# EAGLE board PLT-01-RevB (EAGLE 9.6.2)
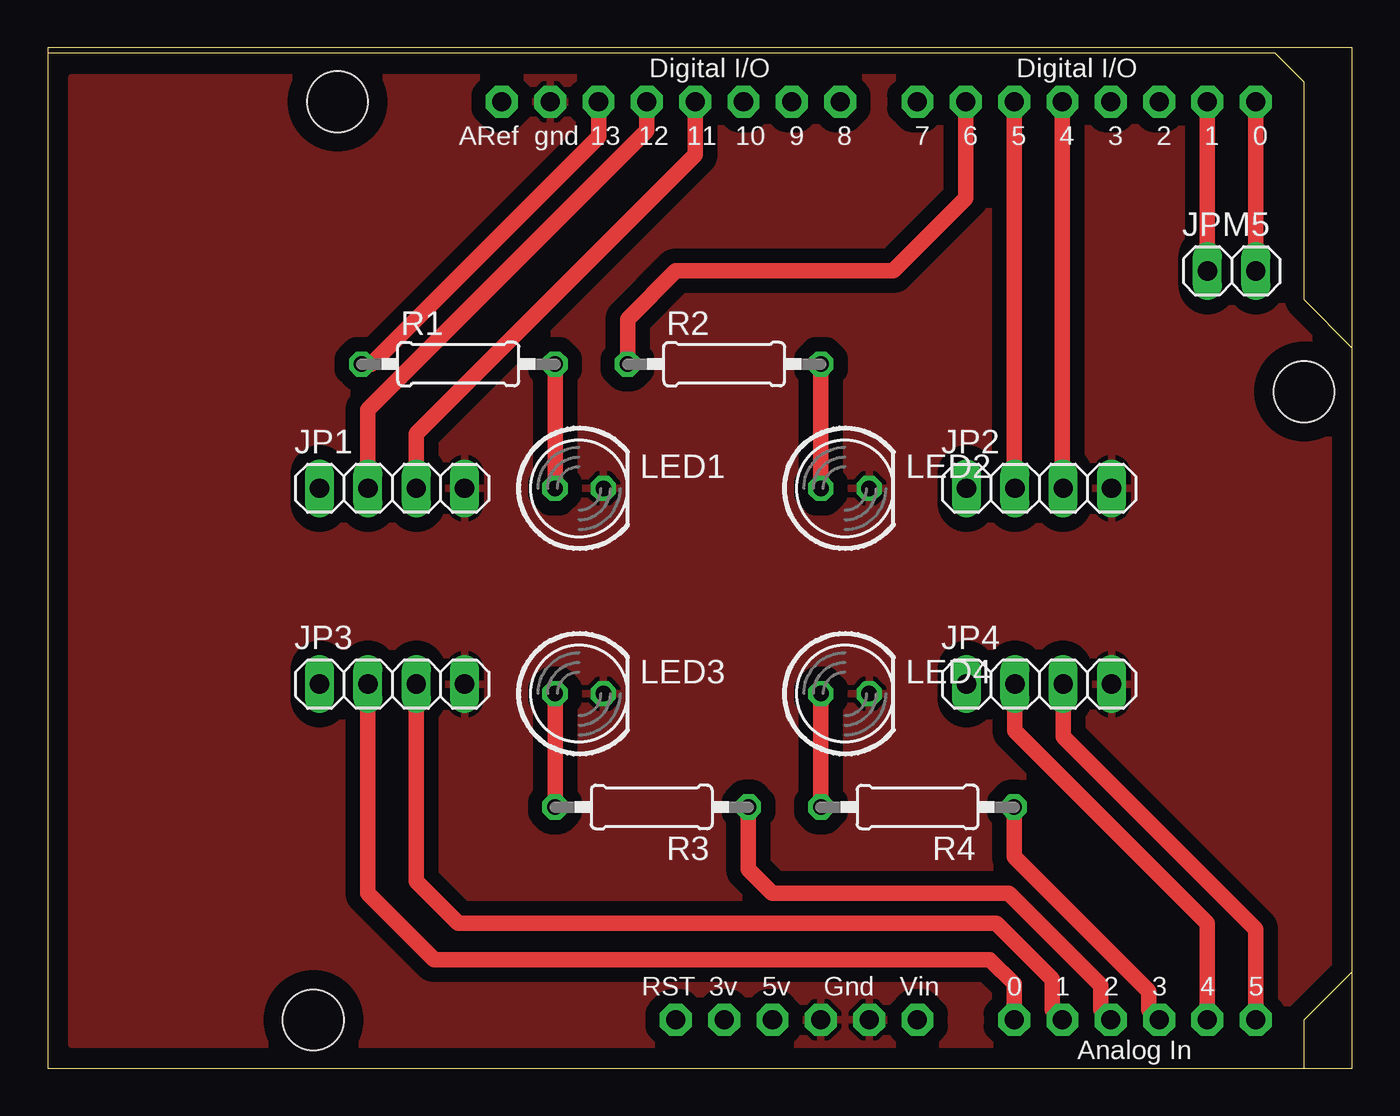
[diagram p0: board, top side]
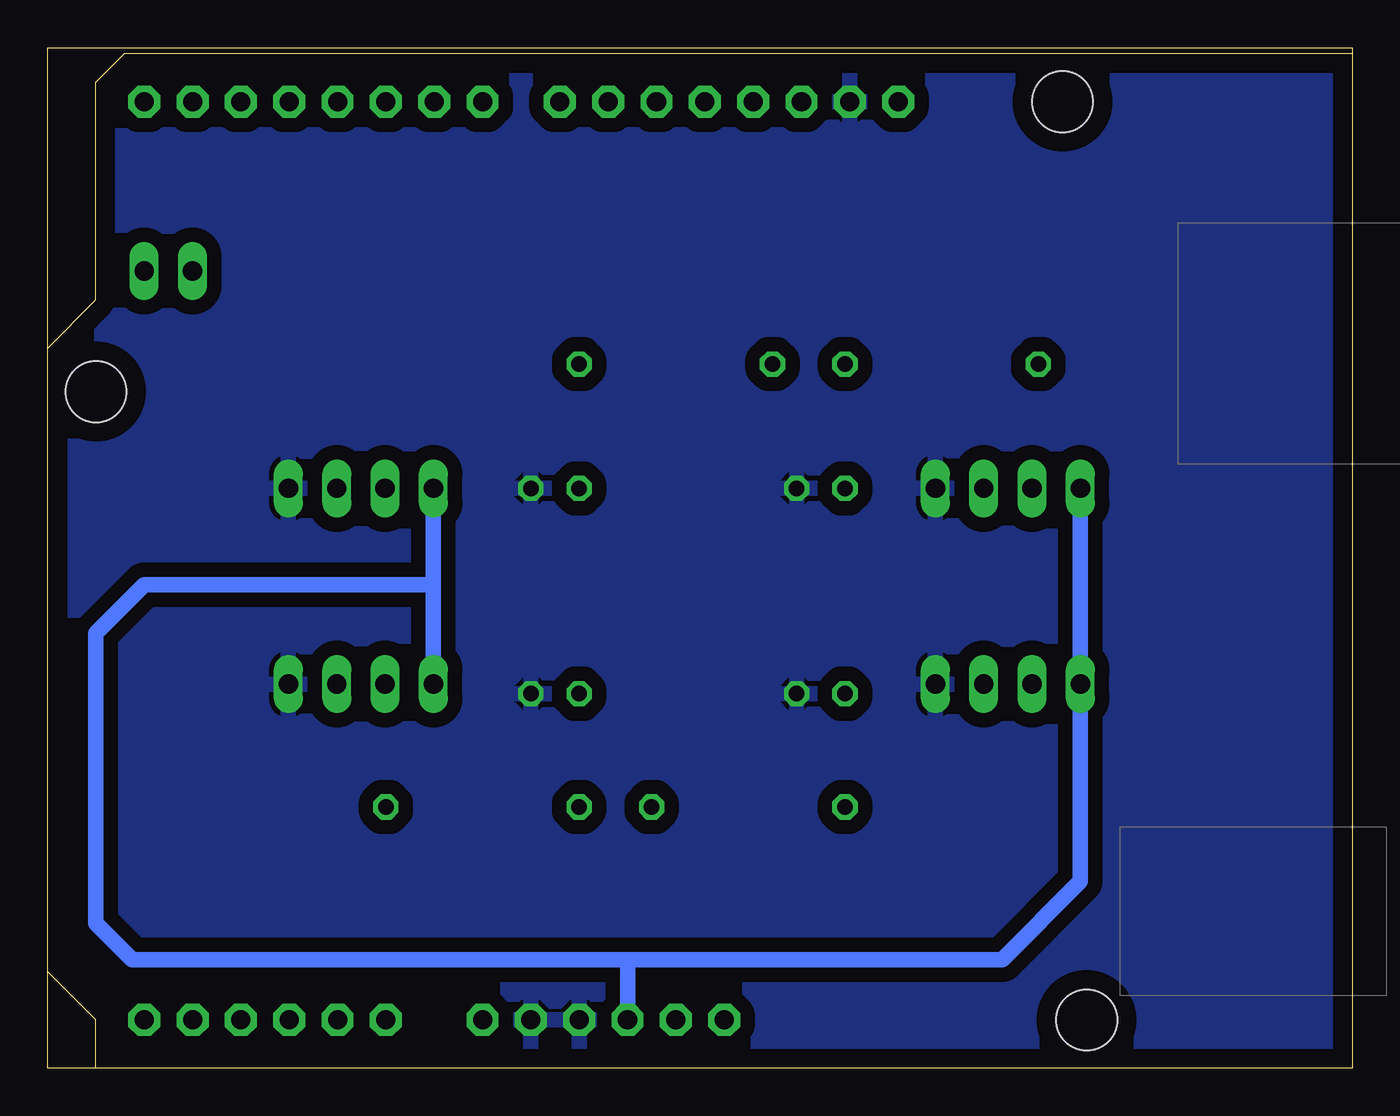
[diagram p1: board, bottom side, seen from below]

Size 68.58 x 53.64 mm. Coordinates in mm from the lower left corner, seen from the top.
Outline: 0,0 68.56,0 68.56,53.64 0,53.64 0,0
Copper layers (1*16): Top 0.035mm / dielectric 1.5mm / Bottom 0.035mm
Design rules "default *": minimum track width 10mil, minimum drill 24mil, track to track 30mil, track to pad 30mil, pad to pad 30mil, via to via 30mil, smd to smd 30mil, copper to edge 40mil, drill to drill 8mil, minimum pad ring 10mil, minimum via ring 8mil, stop-mask expansion 4mil, vias tented up to drill 0mil, thermal gap 10mil

## Footprints (pad centres in the part's own frame; a part is rotated, then mirrored left to right if it is on the bottom)
1X04 = drill 1.016 long: 1 -3.81,0; 2 -1.27,0; 3 1.27,0; 4 3.81,0
1X02 = drill 1.016 long: 1 -1.27,0; 2 1.27,0
LED5MM = drill 0.813 octagon: A -1.27,0; K 1.27,0
0207/10 = drill 0.813 octagon: 1 -5.08,0; 2 5.08,0
ARDUINO = drill 1 pad 1.676 octagon: 3V 35.56,2.54; 5V 38.1,2.54; A0 50.8,2.54; A1 53.34,2.54; A2 55.88,2.54; A3 58.42,2.54; A4 60.96,2.54; A5 63.5,2.54; AREF 23.876,50.8; D0 63.5,50.8; D1 60.96,50.8; D2 58.42,50.8; D3 55.88,50.8; D4 53.34,50.8; D5 50.8,50.8; D6 48.26,50.8; D7 45.72,50.8; D8 41.656,50.8; D9 39.116,50.8; D10 36.576,50.8; D11 34.036,50.8; D12 31.496,50.8; D13 28.956,50.8; GND 26.416,50.8; GND1 43.18,2.54; GND2 40.64,2.54; RESET 33.02,2.54; VIN 45.72,2.54 | hole 3.2: 15.24,50.8; 66.04,35.56; 13.97,2.54

## Placement (x,y rotation side)
JP1  [1X04]  18.11,30.48 0 top
JP2  [1X04]  52.11,30.48 0 top
JP3  [1X04]  18.11,20.19 0 top
JP4  [1X04]  52.11,20.19 0 top
JPM5  [1X02]  62.23,41.91 0 top
LED1  [LED5MM]  27.94,30.48 0 top
LED2  [LED5MM]  41.91,30.48 0 top
LED3  [LED5MM]  27.94,19.69 0 top
LED4  [LED5MM]  41.91,19.69 0 top
R1  [0207/10]  21.59,37.01 0 top
R2  [0207/10]  35.56,37.01 0 top
R3  [0207/10]  31.75,13.73 180 top
R4  [0207/10]  45.72,13.73 180 top
U$1  ARDUINOUNO  [ARDUINO]  0,0 0 top

## Library data of the parts
JP1-JP4 JPM5 = pinhead
LED1-LED4 = led
R1-R4 = resistor
U$1 = adafruit

## Nets
3V: U$1.3V
5V: JP1.1 JP2.1 JP3.1 JP4.1 U$1.5V
GND: JP1.4 JP2.4 JP3.4 JP4.4 LED1.K LED2.K LED3.K LED4.K U$1.GND U$1.GND1 U$1.GND2
N$1: R4.1 U$1.A3
N$3: JP4.3 U$1.A5
N$4: JP2.3 U$1.D4
N$5: JP2.2 U$1.D5
N$6: JP4.2 U$1.A4
N$7: R3.1 U$1.A2
N$8: JP1.3 U$1.D11
N$9: JP1.2 U$1.D12
N$10: R1.1 U$1.D13
N$11: LED2.A R2.2
N$12: LED1.A R1.2
N$13: R2.1 U$1.D6
N$14: LED4.A R4.2
N$15: JP3.2 U$1.A0
N$16: LED3.A R3.2
N$17: JP3.3 U$1.A1
RX: JPM5.2 U$1.D0
TX: JPM5.1 U$1.D1
VIN: U$1.VIN

## Tracks (layer width: path | path; a pad name or v marks a point on that pad's centre or on a via)
5V
  Bottom 0.813: U$1.5V 38.1,5.71 | 38.1,5.71 18.41,5.71 14.3,9.83 JP3.1 JP1.1 | JP4.1 48.3,25.4 | 48.3,25.4 JP2.1 | 38.1,5.71 64.14,5.71 66.04,7.62 66.04,22.86 63.5,25.4 48.3,25.4
GND
  pour Top: 1.27,52.07 1.27,1.27 67.31,1.27 67.31,52.07
  pour Bottom: 1.27,52.07 1.27,5.08 1.27,1.27 67.31,1.27 67.31,52.07
N$1
  Top 0.813: U$1.A3 57.89,3.07 57.89,4.04 50.8,11.13 50.8,11.43 R4.1
N$3
  Top 0.813: JP4.3 53.38,17.43 63.5,7.31 U$1.A5
N$4
  Top 0.813: U$1.D4 53.34,30.52 JP2.3
N$5
  Top 0.813: U$1.D5 50.8,30.52 JP2.2
N$6
  Top 0.813: JP4.2 50.84,17.74 60.96,7.62 U$1.A4
N$7
  Top 0.813: U$1.A2 55.35,3.07 55.35,4.35 50.5,9.2 38.1,9.2 36.83,10.46 R3.1
N$8
  Top 0.813: JP1.3 19.38,33.35 34.04,48.01 U$1.D11
N$9
  Top 0.813: U$1.D12 31.5,49.28 16.84,34.62 JP1.2
N$10
  Top 0.813: R1.1 17,37.01 28.96,48.96 U$1.D13
N$11
  Top 0.813: R2.2 LED2.A
N$12
  Top 0.813: R1.2 LED1.A
N$13
  Top 0.813: U$1.D6 48.26,45.72 44.45,41.91 33.02,41.91 30.48,39.37 R2.1
N$14
  Top 0.813: R4.2 LED4.A
N$15
  Top 0.813: U$1.A0 50.8,4.45 49.53,5.71 20.32,5.71 16.84,9.2 JP3.2
N$16
  Top 0.813: R3.2 LED3.A
N$17
  Top 0.813: U$1.A1 52.81,3.07 52.81,4.67 49.85,7.62 21.59,7.62 19.38,9.83 JP3.3
RX
  Top 0.813: JPM5.2 U$1.D0
TX
  Top 0.813: JPM5.1 U$1.D1